# EAGLE board cardimetry_board (EAGLE 9.7.0)
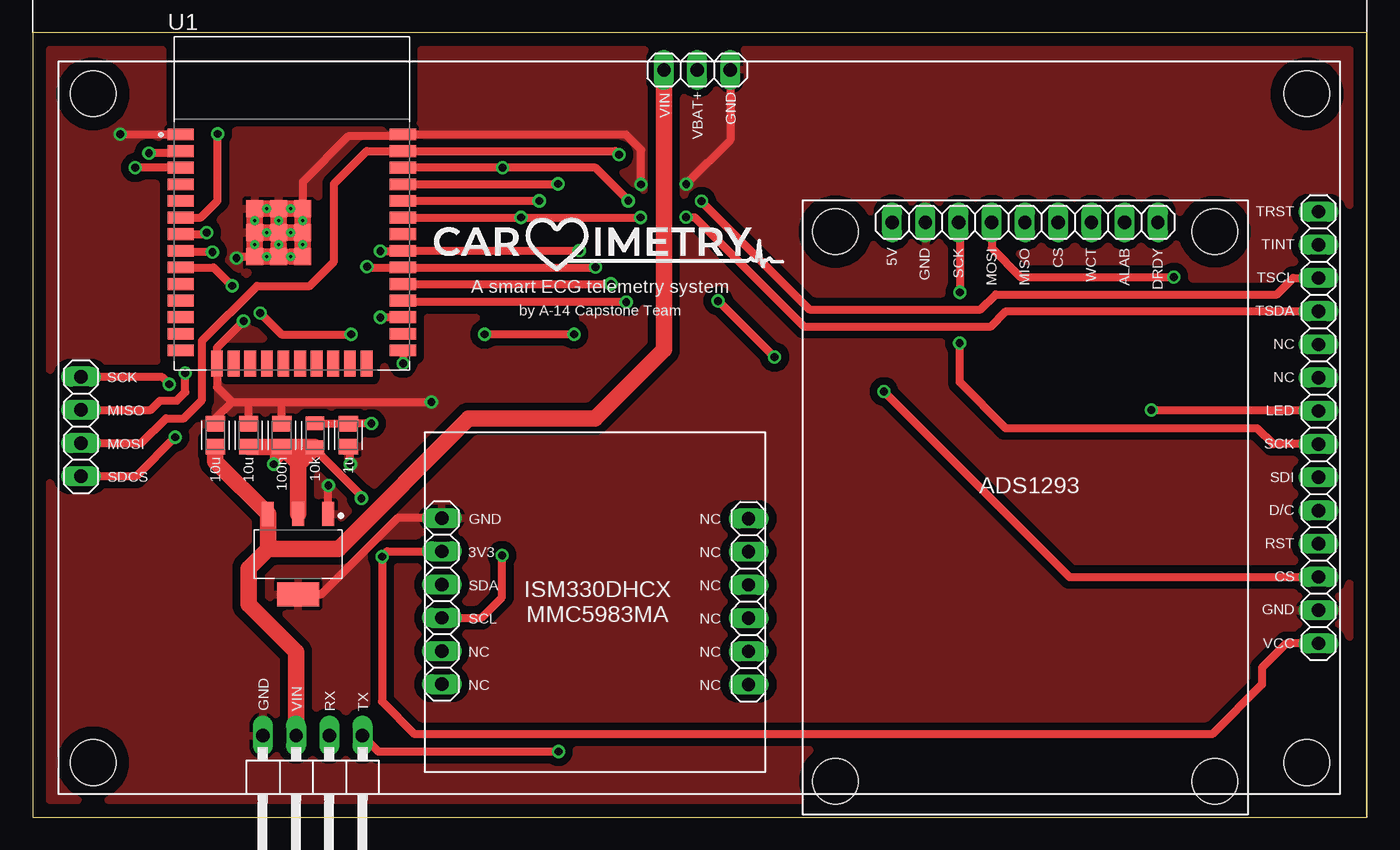
[diagram p0: board, top side]
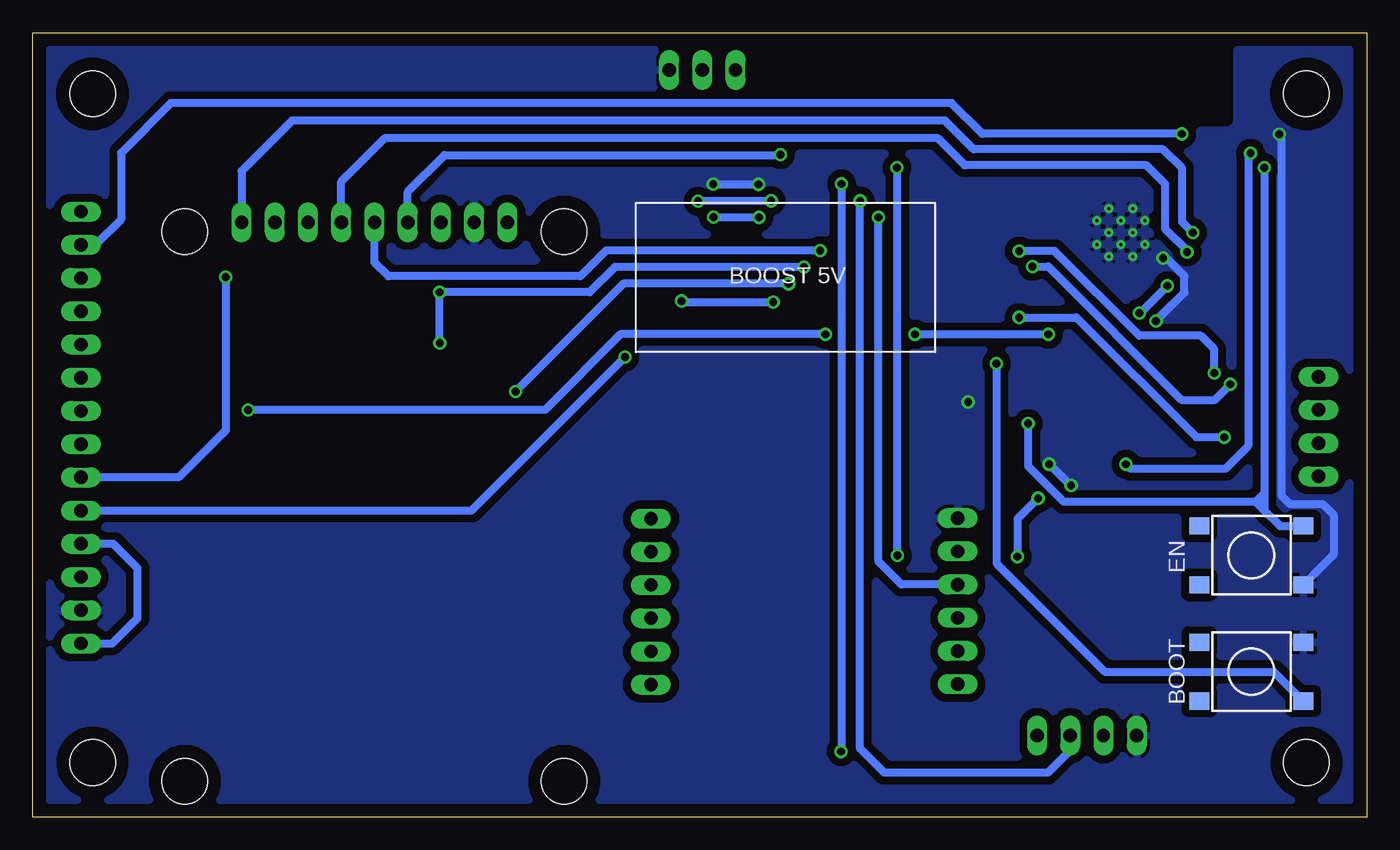
[diagram p1: board, bottom side, seen from below]

Size 102 x 60 mm. Coordinates in mm from the lower left corner, seen from the top.
Outline: 0,0 102,0 102,60 0,60 0,0
Copper layers (1*16): Top / Bottom
Stack-up Default Layer Stack: Top User Defined 0.035mm / Dielectric-1 User Defined 1.5mm / Bottom User Defined 0.035mm
Design rules "default": minimum track width 6mil, minimum drill 0.35mm, track to track 6mil, track to pad 6mil, pad to pad 6mil, via to via 6mil, smd to smd 6mil, copper to edge 40mil, drill to drill 6mil, minimum pad ring 10mil, minimum via ring 8mil, stop-mask expansion 4mil, vias tented up to drill 0mil, thermal gap 10mil
Holes 3.5 mm at 97.42,55.33 97.42,4.18 4.62,4.18 4.62,55.33 90.37,44.79 61.37,44.79 61.37,2.77 90.37,2.77

## Footprints (pad centres in the part's own frame; a part is rotated, then mirrored left to right if it is on the bottom)
CAPC2012X110 = smd 1.165 x 1.465: 1 -0.875,0; 2 0.875,0
1X07 = drill 1.016 long: 1 -7.62,0; 2 -5.08,0; 3 -2.54,0; 4 0,0; 5 2.54,0; 6 5.08,0; 7 7.62,0
1X04 = drill 1.016 long: 1 -3.81,0; 2 -1.27,0; 3 1.27,0; 4 3.81,0
SOT230P700X170-4 = smd 1.86 x 0.898: 1 -3.075,2.3; 2 -3.075,0; 3 -3.075,-2.3 | smd 1.86 x 3.189: 4 3.075,0
1X06 = drill 1.016 long: 1 -6.35,0; 2 -3.81,0; 3 -1.27,0; 4 1.27,0; 5 3.81,0; 6 6.35,0
1X09 = drill 1.016 long: 1 -10.16,0; 2 -7.62,0; 3 -5.08,0; 4 -2.54,0; 5 0,0; 6 2.54,0; 7 5.08,0; 8 7.62,0; 9 10.16,0
1X03 = drill 1.016 long: 1 -2.54,0; 2 0,0; 3 2.54,0
RESC2012X65 = smd 1.031 x 1.42: 1 -0.919,0; 2 0.919,0
TACTILE_SWITCH_SMD_6.2MM_TALL = smd 1.55 x 1.3: A1 -3.975,-2.25; A2 3.975,-2.25; B1 -3.975,2.25; B2 3.975,2.25
MODULE_ESP32-WROOM-32 = smd 2 x 0.9: 1 -8.5,5.26; 2 -8.5,3.99; 3 -8.5,2.72; 4 -8.5,1.45; 5 -8.5,0.18; 6 -8.5,-1.09; 7 -8.5,-2.36; 8 -8.5,-3.63; 9 -8.5,-4.9; 10 -8.5,-6.17; 11 -8.5,-7.44; 12 -8.5,-8.71; 13 -8.5,-9.98; 14 -8.5,-11.25; 25 8.5,-11.25; 26 8.5,-9.98; 27 8.5,-8.71; 28 8.5,-7.44; 29 8.5,-6.17; 30 8.5,-4.9; 31 8.5,-3.63; 32 8.5,-2.36; 33 8.5,-1.09; 34 8.5,0.18; 35 8.5,1.45; 36 8.5,2.72; 37 8.5,3.99; 38 8.5,5.26 | smd 0.9 x 2: 15 -5.715,-12.25; 16 -4.445,-12.25; 17 -3.175,-12.25; 18 -1.905,-12.25; 19 -0.635,-12.25; 20 0.635,-12.25; 21 1.905,-12.25; 22 3.175,-12.25; 23 4.445,-12.25; 24 5.715,-12.25 | smd 1.33 x 1.33: 39_1 -2.835,-0.405; 39_2 -1,-0.405; 39_3 0.835,-0.405; 39_4 -2.835,-2.24; 39_5 -1,-2.24; 39_6 0.835,-2.24; 39_7 -2.835,-4.075; 39_8 -1,-4.075; 39_9 0.835,-4.075 | drill 0.2 pad 0.3: 39_10 -1.917,-0.405; 39_11 -0.083,-0.405; 39_12 -2.835,-1.323; 39_13 -1,-1.323; 39_14 0.835,-1.323; 39_15 -1.917,-2.24; 39_16 -0.083,-2.24; 39_17 -2.835,-3.158; 39_18 -1,-3.158; 39_19 0.835,-3.158; 39_20 -1.917,-4.075; 39_21 -0.083,-4.075
1X04/90 = drill 1.016 long: 1 -3.81,-3.81; 2 -1.27,-3.81; 3 1.27,-3.81; 4 3.81,-3.81

## Placement (x,y rotation side)
C1  10u  [CAPC2012X110]  13.97,29.21 90 top
C2  10u  [CAPC2012X110]  16.51,29.21 90 top
C3  100n  [CAPC2012X110]  19.05,29.21 90 top
C4  1u  [CAPC2012X110]  24.13,29.21 90 top
DISPLAY_A  PINHD-1X7  [1X07]  98.31,20.92 90 top
DISPLAY_B  PINHD-1X7  [1X07]  98.31,38.7 90 top
DISPLAY_SD  PINHD-1X4  [1X04]  3.68,29.88 90 top
IC1  LD1117_SOT223  [SOT230P700X170-4]  20.29,20.12 270 top
IMU_9-DOF  PINHD-1X6  [1X06]  31.28,16.52 270 top
JP1  PINHD-1X9  [1X09]  75.87,45.5 0 top
JP3  PINHD-1X6  [1X06]  54.73,16.49 90 top
JP4  PINHD-1X3  [1X03]  50.8,57.15 0 top
R1  10k  [RESC2012X65]  21.59,29.21 90 top
S1  MOMENTARY-SWITCH-SPST-SMD-6.2MM-TALL  [TACTILE_SWITCH_SMD_6.2MM_TALL]  8.83,20.03 0 bottom
S2  MOMENTARY-SWITCH-SPST-SMD-6.2MM-TALL  [TACTILE_SWITCH_SMD_6.2MM_TALL]  8.83,11.14 0 bottom
U1  ESP32-WROOM-32  [MODULE_ESP32-WROOM-32]  19.81,46.95 0 top
UART  PINHD-1X4/90  [1X04/90]  21.4,2.43 180 top

## Library data of the parts
C1-C4 = Capacitor; CATEGORY: Capacitor
DISPLAY_A DISPLAY_B = Connector; CATEGORY: Headers; DESCRIPTION: Header, Straight, 7 Position; MANUFACTURER: Generic; MPN: Generic; OPERATING_TEMPERATURE: Generic; PART_STATUS: Active; PITCH: 0.100" (2.54mm); ROHS_COMPLIANCE: Generic; SERIES: Generic; SUB-CATEGORY: Headers, Male Pins; TYPE: Board to Board or Cable, Unshrouded, Through Hole, Straight
DISPLAY_SD = Connector; CATEGORY: Headers; DESCRIPTION: Header, Straight, 4 Position; MANUFACTURER: Generic; MPN: Generic; OPERATING_TEMPERATURE: Generic; PART_STATUS: Active; PITCH: 0.100" (2.54mm); ROHS_COMPLIANCE: Generic; SERIES: Generic; SUB-CATEGORY: Headers, Male Pins; TYPE: Board to Board or Cable, Unshrouded, Through Hole, Straight
IC1 = IC_Power-Management; CATEGORY: IC_Linear; DESCRIPTION: Adjustable voltage regulator; MANUFACTURER: STMicroelectronics; MPN: Generic; SERIES: LM1117; SUB-CATEGORY: Voltage Regulator; TYPE: Linear
IMU_9-DOF JP3 = Connector; CATEGORY: Headers; DESCRIPTION: Header, Straight, 6 Position; MANUFACTURER: Generic; MPN: Generic; OPERATING_TEMPERATURE: Generic; PART_STATUS: Active; PITCH: 0.100" (2.54mm); ROHS_COMPLIANCE: Generic; SERIES: Generic; SUB-CATEGORY: Headers, Male Pins; TYPE: Board to Board or Cable, Unshrouded, Through Hole, Straight
JP1 = Connector; CATEGORY: Headers; DESCRIPTION: Header, Straight, 9 Position; MANUFACTURER: Generic; MPN: Generic; OPERATING_TEMPERATURE: Generic; PART_STATUS: Active; PITCH: 0.100" (2.54mm); ROHS_COMPLIANCE: Generic; SERIES: Generic; SUB-CATEGORY: Headers, Male Pins; TYPE: Board to Board or Cable, Unshrouded, Through Hole, Straight
JP4 = Connector; CATEGORY: Headers; DESCRIPTION: Header, Straight, 3 Position; MANUFACTURER: Generic; MPN: Generic; OPERATING_TEMPERATURE: Generic; PART_STATUS: Active; PITCH: 0.100" (2.54mm); ROHS_COMPLIANCE: Generic; SERIES: Generic; SUB-CATEGORY: Headers, Male Pins; TYPE: Board to Board or Cable, Unshrouded, Through Hole, Straight
R1 = Resistor; CATEGORY: Resistor; SUB-CATEGORY: Fixed
S1 S2 = SparkFun-Switches; PROD_ID: SWCH-11966; SF_SKU: COM-12992
U1 = ESP32-WROOM-32; AVAILABILITY: Not in stock; CHECK_PRICES: https://www.snapeda.com/parts/ESP32-WROOM-32/Espressif+Systems/view-part/?ref=eda; DESCRIPTION: Bluetooth, WiFi 802.11b/g/n, Bluetooth v4.2 +EDR, Class 1, 2 and 3 Transceiver Module 2.4GHz ~ 2.5GHz Antenna Not Included, U.FL Surface Mount; MF: Espressif Systems; MP: ESP32-WROOM-32; PACKAGE: Non Standard Espressif Systems; PRICE: None; SNAPEDA_LINK: https://www.snapeda.com/parts/ESP32-WROOM-32/Espressif+Systems/view-part/?ref=snap
UART = Connector; CATEGORY: Headers; DESCRIPTION: Header, Right Angle, 4 Position; MANUFACTURER: Generic; MPN: Generic; OPERATING_TEMPERATURE: Generic; PART_STATUS: Active; PITCH: 0.100" (2.54mm); ROHS_COMPLIANCE: Generic; SERIES: Generic; SUB-CATEGORY: Headers, Male Pins; TYPE: Board to Board or Cable, Unshrouded, Through Hole, Right Angle

## Nets
3V3: C2.1 C3.1 DISPLAY_A.1 DISPLAY_A.4 IC1.2 IMU_9-DOF.2 R1.1 U1.2
5V: JP1.1
BOOT: S2.A2 U1.25
CS: DISPLAY_A.3 U1.29
DIS_DC: DISPLAY_A.5 U1.28
ECG_CS: JP1.6 U1.8
ECG_DRDB: JP1.9 U1.7
EN: C4.2 R1.2 S1.B2 U1.3
GND: C1.2 C2.2 C3.2 C4.1 DISPLAY_A.2 IC1.1 IC1.4 IMU_9-DOF.1 JP1.2 JP4.3 S1.A2 S2.B2 U1.1 U1.15 U1.38 U1.39_1 U1.39_2 U1.39_3 U1.39_4 U1.39_5 U1.39_6 U1.39_7 U1.39_8 U1.39_9 U1.39_10 U1.39_11 U1.39_12 U1.39_13 U1.39_14 U1.39_15 U1.39_16 U1.39_17 U1.39_18 U1.39_19 U1.39_20 U1.39_21 UART.4
LED: DISPLAY_B.1 U1.9
MISO: DISPLAY_SD.3 JP1.5 U1.31
MOSI: DISPLAY_A.6 DISPLAY_SD.2 JP1.4 U1.37
RX0: U1.34 UART.2
SCK: DISPLAY_A.7 DISPLAY_SD.4 JP1.3 U1.30
SCL: DISPLAY_B.5 IMU_9-DOF.4 U1.36
SD_CS: DISPLAY_SD.1 U1.27
SDA: DISPLAY_B.4 IMU_9-DOF.3 U1.33
T_INT: DISPLAY_B.6 U1.6
TX0: U1.35 UART.1
V_BAT+: JP4.2
VBATMON: U1.4
VIN: C1.1 IC1.3 JP4.1 UART.3

## Tracks (layer width: path | path; a pad name or v marks a point on that pad's centre or on a via)
3V3  (via drill 0.6)
  Top 0.61: U1.2 11.16,50.8 v8.89,50.8 | 19.21,27.78 v18.43,27 18.43,27.71 18.44,27.72 | 20.09,28.33 19.89,28.33 19.27,27.72 19.21,27.78 | 18.44,27.72 18.44,28.32 18.45,28.33 | 18.44,27.72 C3.1 19.05,27.94 19.21,27.78 | R1.1 21.59,28.13 25.13,24.59 v25.13,24.39 | DISPLAY_A.1 95.85,13.3 93.98,11.43 93.98,10.16 90.17,6.35 29.21,6.35 26.71,8.85 v26.71,19.93 27.11,20.33 IMU_9-DOF.2
  Top 1.27: C2.1 18.45,28.33 C3.1 | C3.1 20.09,28.33 21.55,28.33 R1.1 20.29,26.99 | 20.29,26.99 IC1.2 | 20.29,26.99 20.29,27.09 C3.1
  Bottom 0.61: v8.89,50.8 9.07,50.62 9.07,28.39 10.81,26.65 18.08,26.65 v18.43,27 | v25.13,24.39 26.71,22.82 v26.71,19.93 | DISPLAY_A.1 95.92,13.3 93.98,15.24 93.98,19.05 95.85,20.92 DISPLAY_A.4
BOOT  (via drill 0.6)
  Top 0.61: U1.25 v28.31,34.71 v28.31,34.7
  Bottom 0.61: S2.A2 7.1,11.13 20.02,11.13 28.31,19.42 v28.31,34.7
CS  (via drill 0.6)
  Top 0.61: U1.29 44.19,40.78 v44.2,40.8 | v65.08,32.56 79.27,18.38 DISPLAY_A.3
  Bottom 0.61: v44.2,40.8 56.85,40.8 v65.08,32.56
DIS_DC  (via drill 0.6)
  Top 0.61: v56.72,35.2 52.43,39.49 v52.4,39.49 | v45.39,39.41 28.41,39.41 U1.28
  Bottom 0.61: DISPLAY_A.5 68.46,23.46 v56.72,35.2 | v52.4,39.49 52.33,39.41 v45.39,39.41
ECG_CS  (via drill 0.6)
  Top 0.61: v13.74,43.23 11.4,43.23 U1.8
  Bottom 0.61: JP1.6 78.41,48.59 75.04,51.96 32.84,51.96 30.74,49.86 16.84,49.86 15.41,48.43 15.41,45 13.74,43.32 v13.74,43.23
ECG_DRDB  (via drill 0.6)  (1 unrouted)
  Top 0.61: U1.7 13.19,44.59 v13.31,44.72
  Bottom 0.61: v13.31,44.72 14.12,45.53 14.12,48.88 | JP1.9 86.03,49.42 82.17,53.28 32.25,53.28 30.06,51.09 15.58,51.09 14.12,49.63 14.12,48.86
EN  (via drill 0.6)
  Top 0.61: R1.2 24.09,30.13 C4.2 24.15,30.11 v25.89,30.11 | U1.3 v7.85,49.67
  Bottom 0.61: v7.85,49.67 v7.84,49.66 7.84,24.73 | 7.84,24.73 7.84,24.13 | 7.84,24.13 7.84,23.48 | 7.84,23.48 6.63,22.28 S1.B2 | 7.84,23.48 8.49,24.13 | 8.49,24.13 23.18,24.13 25.89,26.84 v25.89,30.11 | 7.84,24.13 8.49,24.13 | 8.49,24.13 7.89,24.73 7.84,24.73
GND  (via drill 0.6)
  Top 0.61: C3.2 19.05,31.75 | 19.05,31.75 v30.48,31.75 | JP4.3 53.34,51.79 v49.97,48.42 | v46.52,48.4 46.52,51.04 45.35,52.21 U1.38 28.16,52.07 24.13,52.07 20.64,48.58 U1.39_3 | 15.24,31.75 14.09,32.9 U1.15 14.09,35.91 v16.12,37.94 | 15.24,31.75 16.51,31.75 | 16.51,31.75 19.05,31.75 | C1.2 13.97,30.48 15.24,31.75 | C2.2 16.51,31.75 | U1.1 6.71,52.21 v6.7,52.23 | IC1.4 22.06,17.05 27.94,22.93 31.22,22.93 IMU_9-DOF.1 | v15.57,42.77 15.68,42.88 U1.39_7 | IC1.1 22.59,25.37 v22.61,25.39 | v24.28,27 24.21,27.07 24.21,28.25 C4.1
  Top 1.27: U1.39_21 U1.39_9 U1.39_19 U1.39_6 | U1.39_18 U1.39_8 U1.39_20 U1.39_7 U1.39_17 U1.39_4 | U1.39_4 U1.39_15 U1.39_5 | U1.39_5 U1.39_16 U1.39_6 | U1.39_6 U1.39_14 U1.39_3 U1.39_11 U1.39_2 | U1.39_2 U1.39_13 U1.39_5 | U1.39_4 U1.39_12 U1.39_1 U1.39_10 U1.39_2
  Bottom 0.61: v49.97,48.42 46.53,48.42 v46.52,48.4 | v6.7,52.23 6.53,52.06 6.53,24.61 5.88,23.96 3.37,23.96 2.54,23.12 2.54,20.09 S1.A2 | v16.12,37.94 13.93,40.12 13.93,41.38 15.32,42.77 v15.57,42.77 | v22.61,25.39 24.22,27 v24.28,27
  pour Top (isolate 0.61): -2.83,62.68 104.72,62.68 104.72,-3.14 -3.19,-3.14 -3.19,62.57
  pour Bottom (isolate 0.61): -5.58,65.28 108.31,65.28 108.31,-9.61 -6.36,-9.61 -6.36,65.35
LED  (via drill 0.6)
  Top 0.61: U1.9 13.83,42.05 v15.24,40.64 | v17.38,38.56 19.02,36.93 v24.34,36.93 | v34.56,36.94 v41.39,36.94 | v85.53,31.16 98.23,31.16 DISPLAY_B.1
  Bottom 0.61: v15.24,40.64 17.32,38.56 v17.38,38.56 | v24.34,36.93 v34.55,36.93 v34.56,36.94 | v41.39,36.94 57.04,36.94 62.82,31.16 v85.53,31.16
MISO  (via drill 0.6)
  Top 0.61: DISPLAY_SD.3 9.03,31.15 9.74,31.87 11.01,31.87 11.66,32.52 v11.66,33.98 | v26.58,43.3 28.28,43.3 U1.31 41.77,43.32 v41.79,43.35
  Bottom 0.61: v11.66,33.98 11.66,35.79 12.7,36.83 17.4,36.83 23.87,43.3 v26.58,43.3 | v41.79,43.35 58.15,43.35 60.13,41.37 74.81,41.37 75.87,42.43 JP1.5
MOSI  (via drill 0.6)
  Top 0.61: DISPLAY_SD.2 8.29,28.61 10.19,30.51 11.55,30.51 12.95,31.91 12.95,36.45 17.14,40.64 21.18,40.64 23.04,42.5 23.04,48.44 25.54,50.94 U1.37 44.56,50.94 v44.84,50.66 | JP1.4 73.33,43.51 75.53,41.31 v87.25,41.31
  Bottom 0.61: v44.84,50.66 44.86,50.64 70.52,50.64 73.33,47.84 JP1.4 | v87.25,41.31 87.25,29.59 90.84,26 DISPLAY_A.6
RX0  (via drill 0.6)
  Top 0.61: v38.74,47.13 U1.34 | v38.74,47.13
  Bottom 0.61: v38.74,47.13 38.74,5.27 36.88,3.42 24.37,3.42 22.67,5.11 UART.2
SCK  (via drill 0.6)
  Top 0.61: v25.56,42.12 25.62,42.05 U1.30 43.01,42.05 v43.04,42.08 | DISPLAY_SD.4 9.84,33.69 v10.43,33.11 | v70.89,40.15 70.89,45.4 JP1.3 | DISPLAY_A.7 94.84,28.54 93.62,29.75 74.39,29.75 70.87,33.27 v70.87,36.26
  Bottom 0.61: v25.56,42.12 24.36,42.12 14.16,31.92 11.62,31.92 v10.43,33.11 | v43.04,42.08 57.49,42.08 59.43,40.15 v70.89,40.15 70.87,40.13 v70.87,36.26
SCL  (via drill 0.6)
  Top 0.61: IMU_9-DOF.4 34.3,15.25 35.88,16.83 v35.88,20.02 | U1.36 v35.93,49.67 43.04,49.67 45.53,47.18 v45.53,47.14 | v51.14,47.11 51.14,47.07 59.37,38.83 72.46,38.83 73.63,39.99 95.12,39.99 96.36,41.24 DISPLAY_B.5
  Bottom 0.61: v35.88,20.02 35.88,49.62 v35.93,49.67 | v51.14,47.11 51.1,47.14 v45.53,47.14
SD_CS  (via drill 0.6)
  Top 0.61: U1.27 28.29,38.23 v26.58,38.23 | v10.89,29.06 7.9,26.07 DISPLAY_SD.1
  Bottom 0.61: v26.58,38.23 22.21,38.23 13.05,29.06 v10.89,29.06
SDA  (via drill 0.6)
  Top 0.61: U1.33 37.32,45.86 v37.33,45.87 v46.48,45.87 | v49.94,45.89 50.61,45.89 58.96,37.54 73.26,37.54 74.42,38.7 DISPLAY_B.4
  Bottom 0.61: IMU_9-DOF.3 35.57,17.79 37.33,19.55 v37.33,45.87 | v46.48,45.87 49.92,45.87 v49.94,45.89
T_INT  (via drill 0.6)
  Top 0.61: U1.6 12.84,45.86 14.13,47.15 v14.13,52.26
  Bottom 0.61: v14.13,52.26 29.4,52.26 31.75,54.61 91.44,54.61 95.25,50.8 95.25,45.72 97.19,43.78 DISPLAY_B.6
TX0  (via drill 0.6)
  Top 0.61: U1.35 40.13,48.4 v40.17,48.43 | v40.2,5.02 26.43,5.02 UART.1
  Bottom 0.61: v40.17,48.43 40.17,5.05 v40.2,5.02
VIN
  Top 1.27: C1.1 13.97,27.22 IC1.3 17.99,20.53 | 17.99,20.53 16.51,19.05 16.51,16.26 20.13,12.64 UART.3 | 17.99,20.53 23.4,20.53 33.34,30.48 42.98,30.48 48.26,35.76 JP4.1

## Text on the board
tPlace: VIN | VBAT+ | GND | TRST | TINT | 5V | CS | GND | SCK | MOSI | MISO | WCT | ALAB | DRDY | A smart ECG telemetry system | TSCL | by A-14 Capstone Team | TSDA | NC | SCK | NC | MISO | LED | MOSI | SCK | 10u | 10u | 10k | 1u | SDCS | 100n | SDI | ADS1293 | GND | NC | D/C | RST | 3V3 | NC | SDA | NC | CS | ISM330DHCX / MMC5983MA | GND | SCL | NC | NC | NC | VCC | NC | NC | GND | VIN | RX | TX
bPlace: BOOST 5V | EN | BOOT